# Altium PCB PCB_Program Counter - 3.0_2021-10-28.pcbdoc
Units mm, origin at the board's own origin, x right, y up, seen from the top; angles counter-clockwise.
Board outline 124.59 x 83.95 mm, 2 copper layers (Top Layer, Bottom Layer); 15 components, 27 nets, 68 pads, 7 vias.
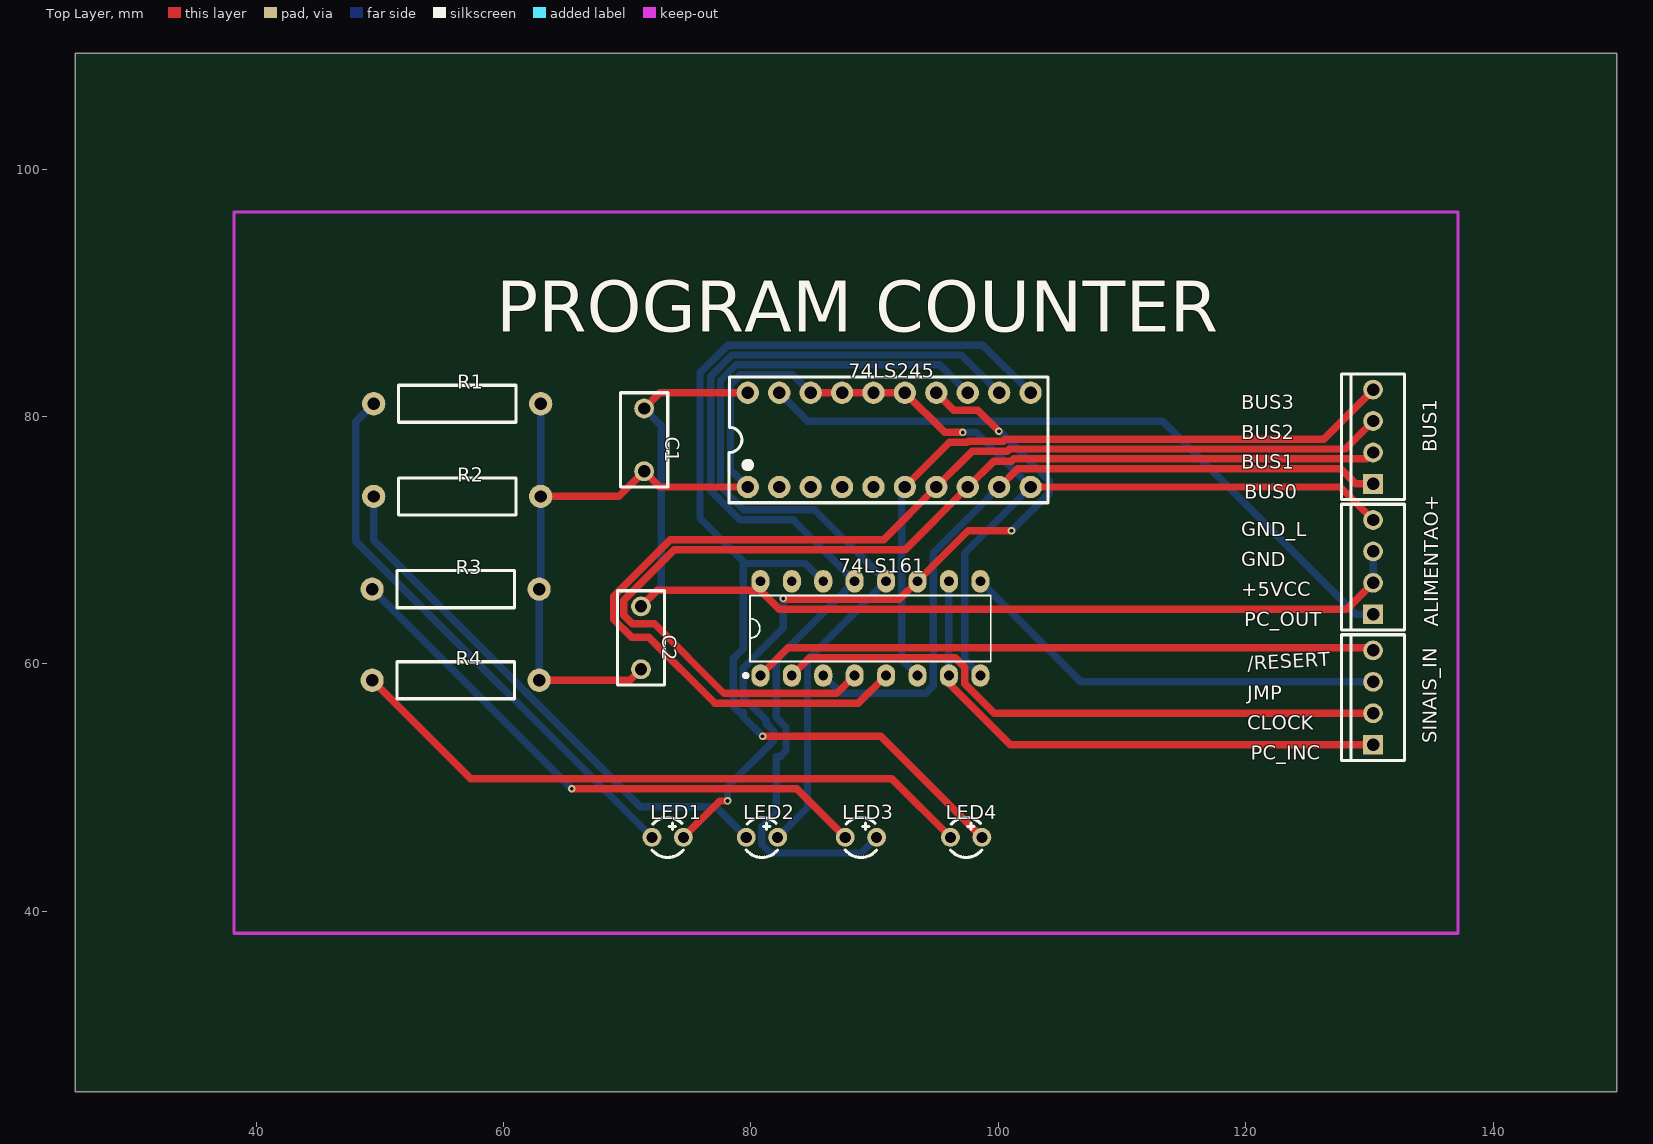
[diagram p0: Top Layer view]
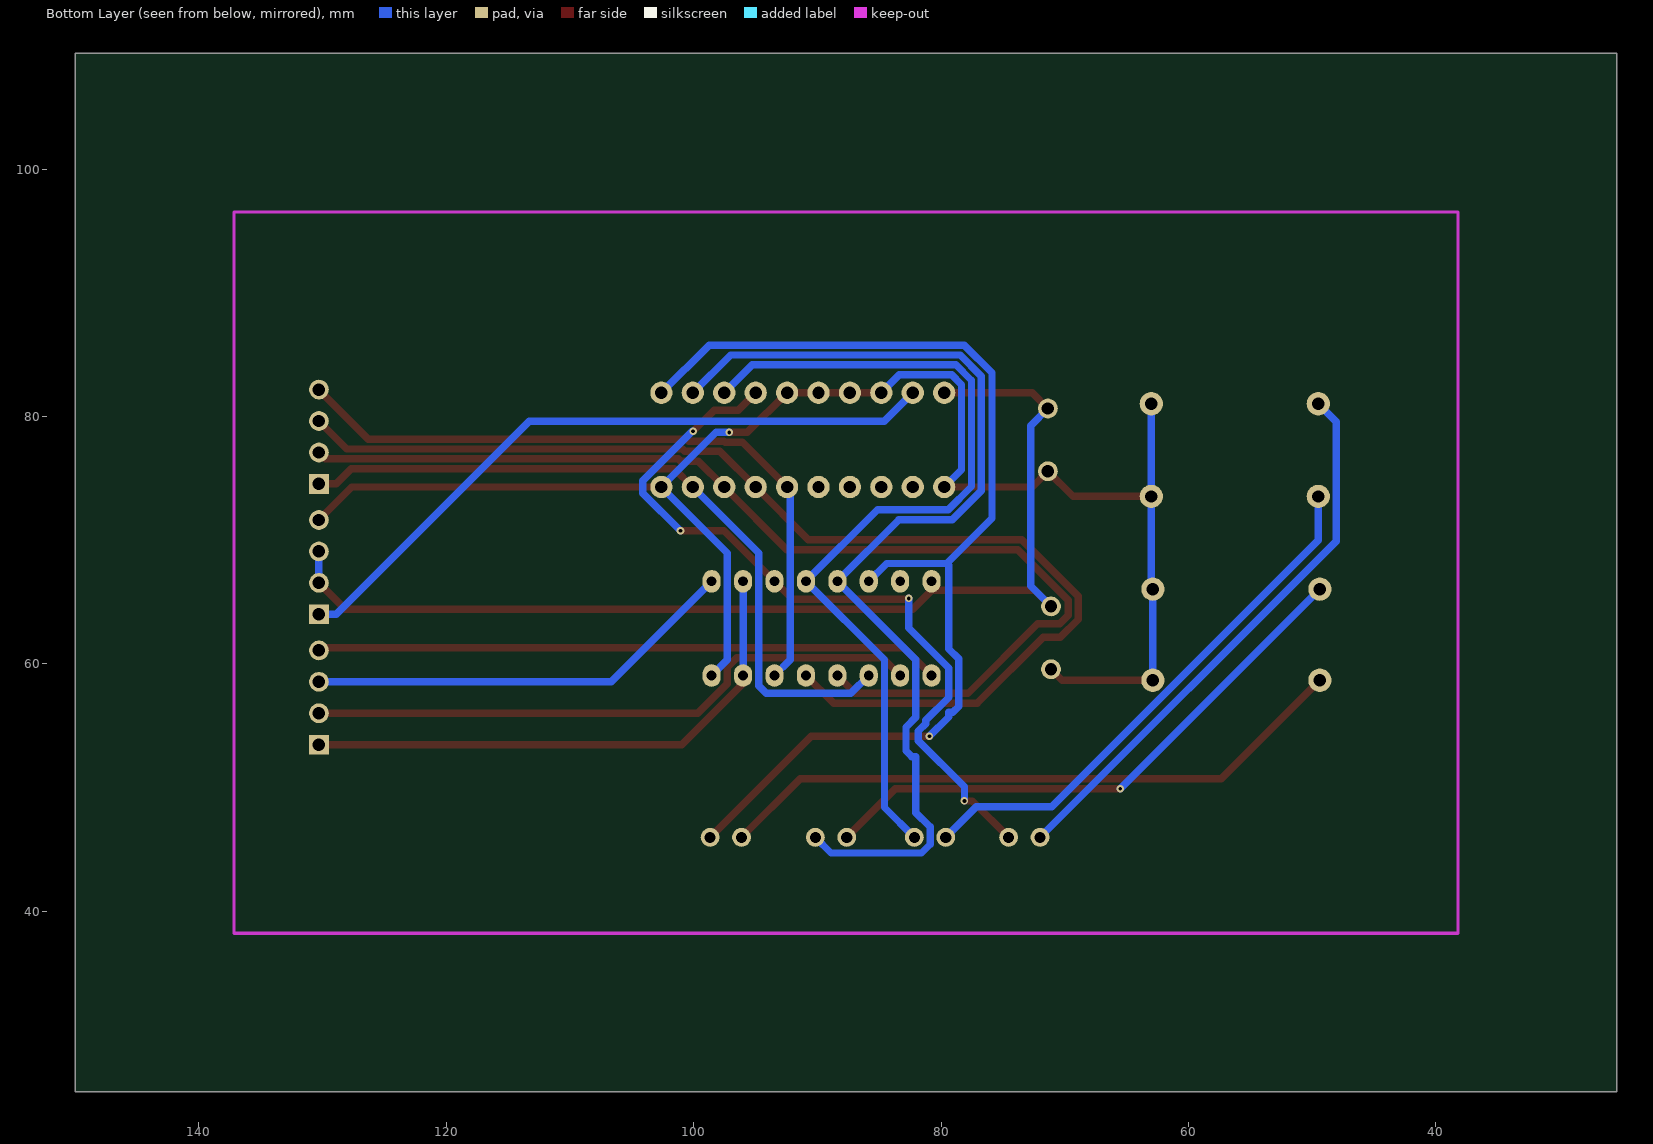
[diagram p1: Bottom Layer view, seen from below]

## Layer stack, top to bottom
Top Layer: signal copper (thickness not stored)
Dielectric: dielectric 0.32, FR-4, Dk 4.8
Bottom Layer: signal copper (thickness not stored)

## Board outline
149.987,25.4 25.4,25.4 25.4,109.347 149.987,109.347

## Components (designator, comment, footprint, x,y, rotation, side; value= is the part's Value field where it differs from the comment)
74LS161 "XD74LS161" DIP-16_L19.2-W6.6-P2.54-LS7.6-BL 89.662,62.865 r0 top
74LS245 "SN74LS245N" DIP-20_L25.5-W10.0-P2.54-LS7.6-BL 91.186,78.105 r0 top
ALIMENTAO+ "171825-4" HDR-TH_4P-P2.54-D1.0 130.302,67.818 r90 top
BUS1 "BUS" HDR-TH_4P-P2.54-D1.0 130.302,78.359 r90 top
C1 "100nF 63V" CAP-TH_L7.6-W3.8-P5.08-D0.51 71.374,78.105 r270 top
C2 "100nF 63V" CAP-TH_L7.6-W3.8-P5.08-D0.51 71.12,62.103 r270 top
LED1 "VERDE" LED-TH_BD3.0-P2.54-RD-GREEN 73.279,45.974 r0 top
LED2 "VERDE" LED-TH_BD3.0-P2.54-RD-GREEN 80.899,45.974 r0 top
LED3 "VERDE" LED-TH_BD3.0-P2.54-RD-GREEN 88.9,45.974 r0 top
LED4 "VERDE" LED-TH_BD3.0-P2.54-RD-GREEN 97.409,45.974 r0 top
R1 "470" RES-TH_BD3.0-L9.5-P13.50-D0.6 56.261,81.026 r0 top
R2 "470" RES-TH_BD3.0-L9.5-P13.50-D0.6 56.261,73.533 r0 top
R3 "470" RES-TH_BD3.0-L9.5-P13.50-D0.6 56.134,66.04 r0 top
R4 "470" RES-TH_BD3.0-L9.5-P13.50-D0.6 56.134,58.674 r0 top
SINAIS_IN "SINAIS IN" HDR-TH_4P-P2.54-D1.0 130.302,57.277 r90 top

## Footprints (in the part's own frame and the unit in brackets; to place one, negate y for a bottom-side part, rotate by r counter-clockwise, add the part's x,y. Pads: shape width x height; smd on the part's side, far side on the other; paste and mask are expansions set on the pad)
CAP-TH_L7.6-W3.8-P5.08-D0.51 [mm]
  round 1.6 hole 1: 1(-2.54,0) 2(2.54,0)
  silkscreen extent -3.81,-1.91 3.81,1.91
DIP-16_L19.2-W6.6-P2.54-LS7.6-BL [mm]
  oval 1.46x1.825 hole 0.8: 1(-8.89,-3.81) 2(-6.35,-3.81) 3(-3.81,-3.81) 4(-1.27,-3.81) 5(1.27,-3.81) 6(3.81,-3.81) 7(6.35,-3.81) 8(8.89,-3.81) 9(8.89,3.81) 10(6.35,3.81) 11(3.81,3.81) 12(1.27,3.81) 13(-1.27,3.81) 14(-3.81,3.81) 15(-6.35,3.81) 16(-8.89,3.81)
  silkscreen extent -10.22,-3.96 9.73,2.67
DIP-20_L25.5-W10.0-P2.54-LS7.6-BL [mm]
  round 1.8 hole 1: 1(-11.43,-3.81) 2(-8.89,-3.81) 3(-6.35,-3.81) 4(-3.81,-3.81) 5(-1.27,-3.81) 6(1.27,-3.81) 7(3.81,-3.81) 8(6.35,-3.81) 9(8.89,-3.81) 10(11.43,-3.81) 11(11.43,3.81) 12(8.89,3.81) 13(6.35,3.81) 14(3.81,3.81) 15(1.27,3.81) 16(-1.27,3.81) 17(-3.81,3.81) 18(-6.35,3.81) 19(-8.89,3.81) 20(-11.43,3.81)
  silkscreen extent -12.95,-5.08 12.83,5.08
HDR-TH_4P-P2.54-D1.0 [mm]
  rect 1.6x1.6 hole 1: 1(-3.81,0)
  round 1.6 hole 1: 2(-1.27,0) 3(1.27,0) 4(3.81,0)
  silkscreen extent -5.08,-2.54 5.08,2.54
LED-TH_BD3.0-P2.54-RD-GREEN [mil]
  round 60 hole 35.43: 1(-50,0) 2(50,0)
  silkscreen extent -50,-64 50,64
RES-TH_BD3.0-L9.5-P13.50-D0.6 [mm]
  round 1.88 hole 1: 1(-6.75,0) 2(6.75,0)
  silkscreen extent -4.75,-1.5 4.75,1.5

## Via types
v1: diameter 0.61, hole 0.305, Top Layer to Bottom Layer, 7 vias

## Nets (pads, with @x,y where several pads share a name; then routed paths per layer and width w, separated by ;. In a path a pad name is that pad's centre, name@x,y a point inside that pad or via, vN(x,y) a via of type N, cw(c..) or ccw(c..) an arc to the next point about the centre after c; other vN are vias at no path point)
+5V: 74LS161.16 74LS245.20 ALIMENTAO+.2 ALIMENTAO+.3 C1.1 C2.1 | length 90.7
  Top Layer w0.6: C2.1 72.42,65.943 74LS161.16@80.772,65.943 ; C1.1 72.644,81.915 74LS245.20 ; 74LS161.16 74LS161.16@80.772,65.943 ; ALIMENTAO+.2 128.163,64.409 82.306,64.409 74LS161.16@80.772,65.943
  Bottom Layer w0.6: C2.1 72.771,66.294 72.771,79.248 C1.1 ; ALIMENTAO+.2 ALIMENTAO+.3
GND: 74LS161.8 74LS245.1 74LS245.10 74LS245.15 74LS245.16 74LS245.17 74LS245.18 ALIMENTAO+.4 C1.2 C2.2 R1.2 R2.2 R3.2 R4.2 | length 133.1
  Top Layer w0.6: R4.2@62.884,58.674 70.231,58.674 C2.2 ; R2.2@63.011,73.533 69.342,73.533 C1.2 72.644,74.295 74LS245.1 ; 74LS245.18 74LS245.17 74LS245.16 74LS245.15 95.664,78.707 v1(97.136,78.707) ; 74LS245.10 127.635,74.295 ALIMENTAO+.4
  Bottom Layer w0.6: R4.2@62.884,58.674 62.884,66.04 63.011,66.167 63.011,73.533 R1.2@63.011,81.026 ; 74LS245.1 78.354,75.697 78.354,82.577 79.137,83.361 83.39,83.361 74LS245.18 ; v1(97.136,78.707) 98.204,78.707 74LS245.10 97.282,68.961 97.282,60.325 74LS161.8
LED1_1: LED1.1 R1.1 | length 45.6
  Bottom Layer w0.6: R1.1@49.511,81.026 48.069,79.584 48.069,69.914 LED1.1
LED2_1: LED2.1 R2.1 | length 43.6
  Bottom Layer w0.6: R2.1 49.511,69.988 71.058,48.441 77.162,48.441 LED2.1
LED3_1: LED3.1 R3.1 | length 46.6
  Top Layer w0.6: v1(65.523,49.901) 83.703,49.901 LED3.1
  Bottom Layer w0.6: R3.1@49.384,66.04 v1(65.523,49.901)
LED4_1: LED4.1 R4.1 | length 52
  Top Layer w0.6: R4.1@49.384,58.674 57.35,50.708 91.405,50.708 LED4.1
S$31: 
S$33: 
S$35: 
U1_1: 74LS161.1 SINAIS_IN.4 | length 50.5
  Top Layer w0.6: 74LS161.1 83.005,61.288 130.101,61.288 SINAIS_IN.4
U1_2: 74LS161.2 SINAIS_IN.2 | length 50.2
  Top Layer w0.6: 74LS161.2 84.742,60.485 96.535,60.485 97.282,59.738 97.282,58.389 99.664,56.007 SINAIS_IN.2
U1_3: 74LS161.3 74LS245.9 BUS1.1 | length 59.4
  Top Layer w0.6: 74LS245.9 100.098,74.295 101.566,75.763 127.687,75.763 128.9,74.549 BUS1.1
  Bottom Layer w0.6: 74LS161.3 87.295,57.612 94.139,57.612 94.741,58.214 94.741,68.96 74LS245.9
U1_4: 74LS161.4 74LS245.8 BUS1.2 | length 88.6
  Top Layer w0.6: 74LS161.4 86.944,57.607 77.833,57.607 72.211,63.228 70.412,63.228 69.721,63.919 69.721,65.136 73.823,69.237 92.478,69.237 74LS245.8 99.631,76.39 101.058,76.39 101.234,76.566 129.779,76.566 BUS1.2
U1_5: 74LS161.5 74LS245.7 BUS1.3 | length 94.9
  Top Layer w0.6: 74LS161.5 88.681,56.804 77.1,56.804 71.762,62.141 70.364,62.141 68.918,63.586 68.918,65.468 73.491,70.04 90.741,70.04 74LS245.7 95.001,74.295 97.899,77.193 100.726,77.193 100.901,77.369 128.042,77.369 BUS1.3
U1_6: 74LS161.6 74LS245.6 BUS1.4 | length 57
  Top Layer w0.6: 74LS245.6 96.061,77.9 97.471,77.9 97.566,77.996 100.393,77.996 100.569,78.172 126.305,78.172 BUS1.4
  Bottom Layer w0.6: 74LS245.6 92.202,74.041 92.202,60.325 74LS161.6
U1_7: 74LS161.7 74LS161.10 SINAIS_IN.1 | length 44.6
  Top Layer w0.6: 74LS161.7 96.012,58.421 100.966,53.467 SINAIS_IN.1
  Bottom Layer w0.6: 74LS161.7 74LS161.10
U1_9: 74LS161.9 SINAIS_IN.3 | length 35.1
  Bottom Layer w0.6: 74LS161.9 106.68,58.547 SINAIS_IN.3
U1_11: 74LS161.11 74LS245.14 LED1.2 | length 63.2
  Top Layer w0.6: LED1.2 77.49,48.915 v1(78.117,48.915) ; v1(82.616,65.292) 82.696,65.212 92.009,65.212 74LS161.11 97.554,70.757 v1(101.073,70.757) ; 74LS245.14 96.398,80.513 98.35,80.513 v1(100.059,78.803)
  Bottom Layer w0.6: v1(78.117,48.915) 78.117,50.049 81.841,53.774 81.841,54.569 81.239,55.172 81.239,55.431 79.387,57.282 79.387,59.667 82.616,62.895 v1(82.616,65.292) ; v1(100.059,78.803) 100.108,78.803 104.112,74.799 104.112,73.796 v1(101.073,70.757)
U1_12: 74LS161.12 74LS245.13 LED2.2 | length 70.9
  Bottom Layer w0.6: LED2.2 84.583,48.388 84.583,60.326 74LS161.12 85.15,72.457 79.434,72.457 77.551,74.34 77.551,82.909 78.805,84.163 95.288,84.163 74LS245.13
U1_13: 74LS161.13 74LS245.12 LED3.2 | length 84.5
  Bottom Layer w0.6: LED3.2 88.906,44.71 81.587,44.71 80.899,45.398 80.899,46.831 82.042,47.974 82.042,52.506 82.374,52.506 82.845,52.977 82.845,54.882 82.042,55.685 82.042,60.325 74LS161.13 83.413,71.654 79.102,71.654 76.748,74.008 76.748,83.241 78.473,84.966 97.025,84.966 74LS245.12
U1_14: 74LS161.14 74LS245.11 LED4.2 | length 89.7
  Top Layer w0.6: v1(80.951,54.143) 90.51,54.143 LED4.2
  Bottom Layer w0.6: v1(80.951,54.143) 79.387,55.707 79.387,56.078 79.055,56.078 78.585,56.549 78.585,60.401 79.387,61.204 79.387,67.96 79.54,68.113 ; 74LS161.14 84.414,68.113 79.54,68.113 ; 74LS245.11 98.762,85.769 78.141,85.769 75.894,83.523 75.894,71.759 79.54,68.113
U1_15: 74LS161.15
U2_2: 74LS245.2
U2_3: 74LS245.3
U2_4: 74LS245.4
U2_5: 74LS245.5
U2_19: 74LS245.19 ALIMENTAO+.1 | length 55.4
  Bottom Layer w0.6: 74LS245.19 84.601,79.61 113.298,79.61 128.9,64.008 ALIMENTAO+.1

## Silkscreen, mask and mechanical layers (free items; w line width, h text height)
Top Overlay:
  text "PROGRAM COUNTER" at 59.436,86.829 h4.14
  text "BUS3" at 119.634,80.581 h1.14
  text "BUS2" at 119.634,78.168 h1.14
  text "BUS1" at 119.634,75.755 h1.14
  text "BUS0" at 119.888,73.343 h1.14
  text "GND_L" at 119.634,70.294 h1.14
  text "GND" at 119.634,67.882 h1.14
  text "+5VCC" at 119.634,65.468 h1.14
  text "PC_OUT" at 119.888,63.055 h1.14
  text "/RESERT" at 120.172,59.5 h1.14 r3
  text "JMP" at 120.142,57.087 h1.14
  text "CLOCK" at 120.142,54.673 h1.14
  text "PC_INC" at 120.396,52.261 h1.14